# Altium PCB SCOPE.PcbDoc (part 4 of 4)
Units mil, origin at the board's own origin, x right, y up, seen from the top; angles counter-clockwise.
Board outline 7710 x 4000 mil, 2 copper layers (Top Layer, Bottom Layer); 219 components, 350 nets, 1637 pads, 359 vias.
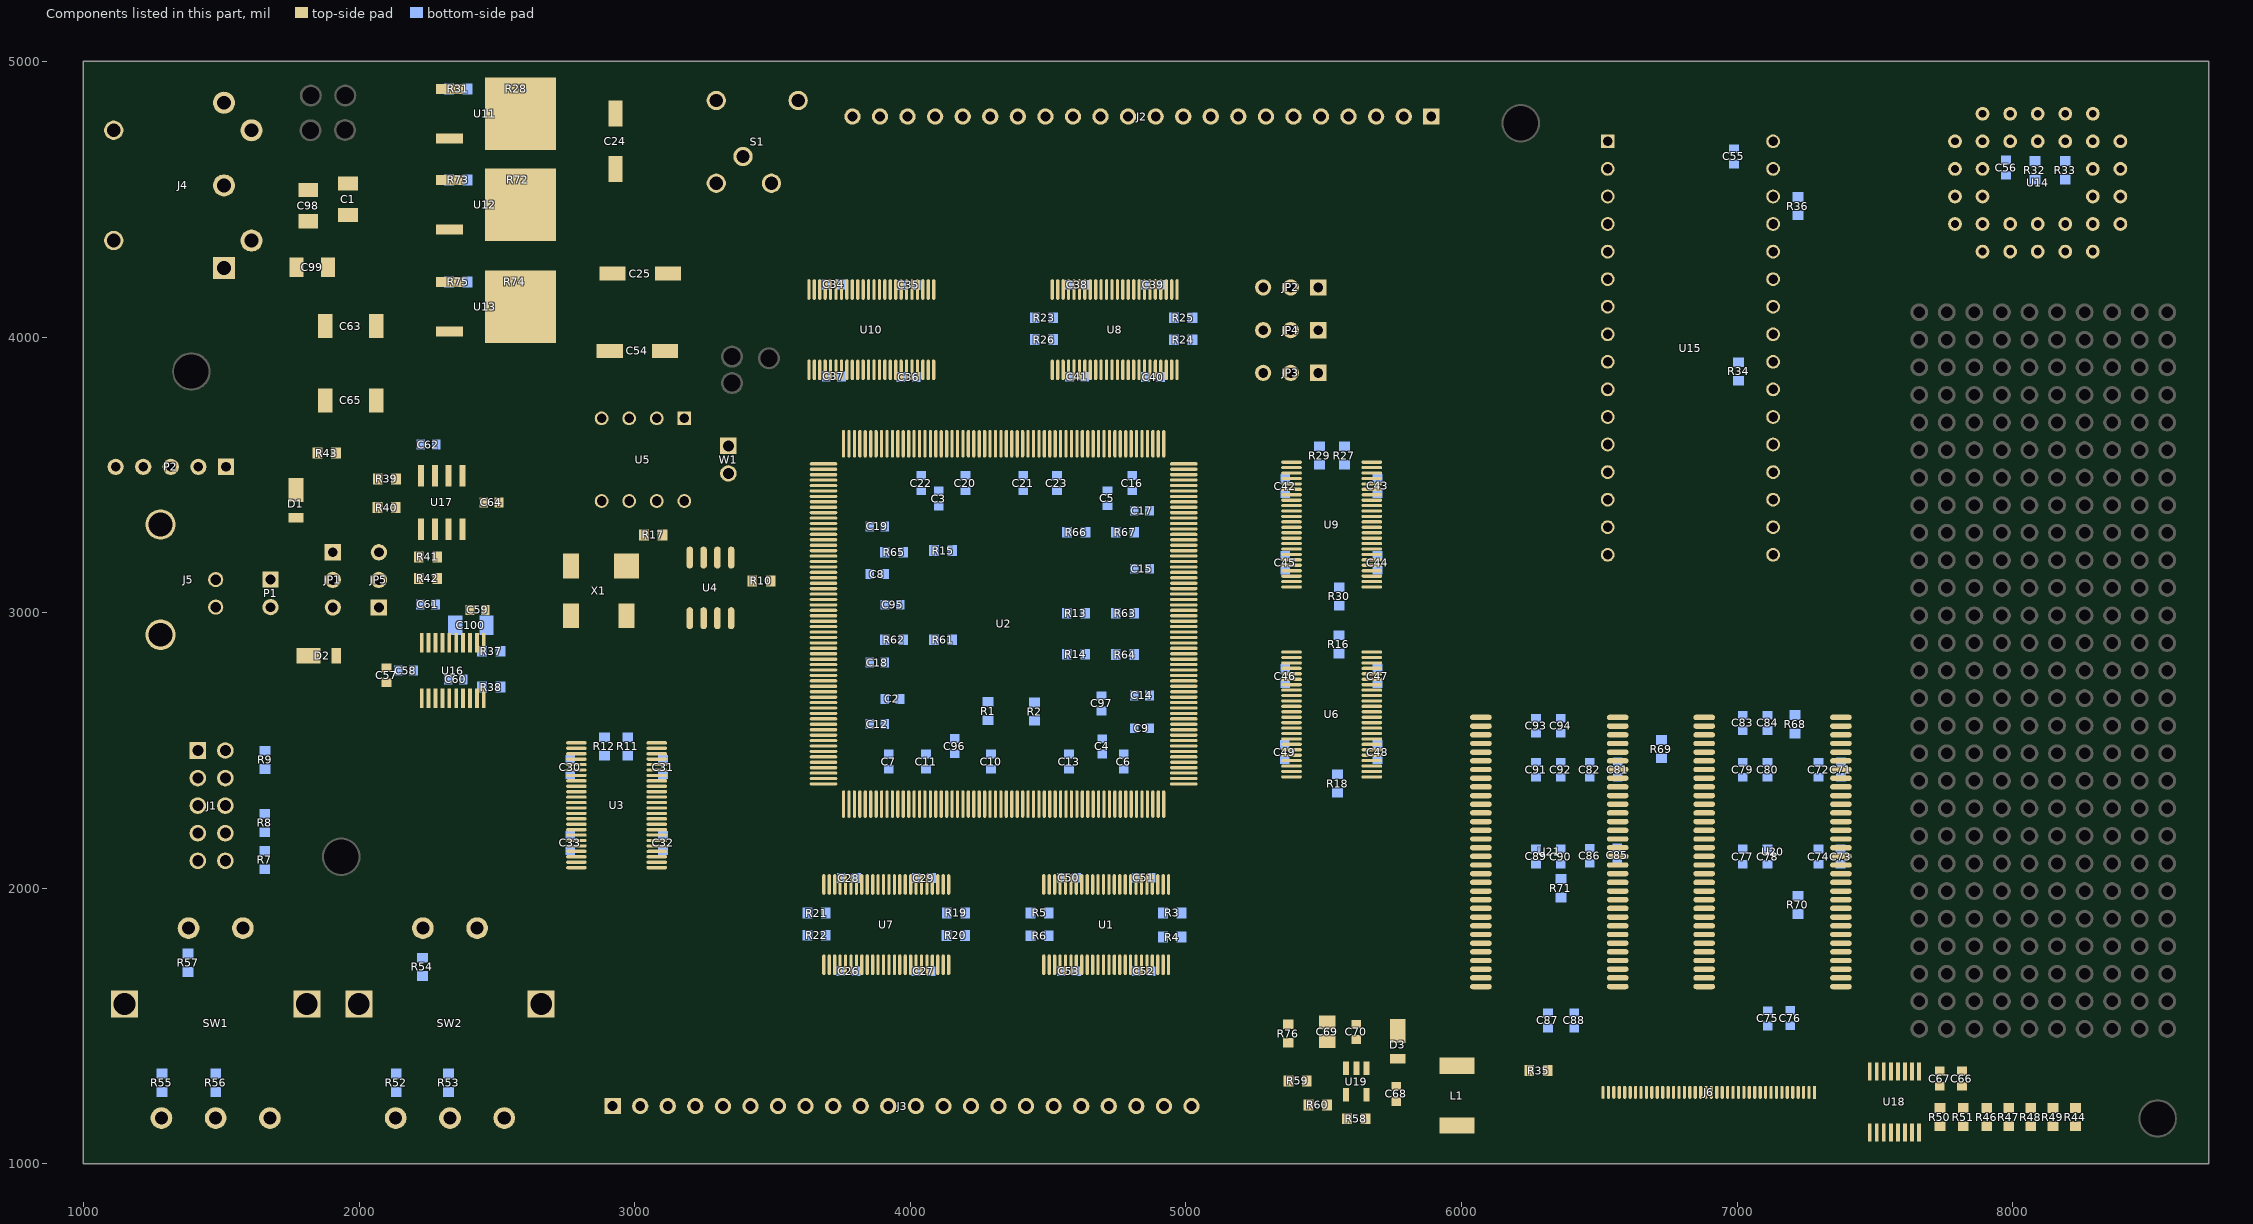
[diagram p4: the components of this part, seen from the top]

## Silkscreen, mask and mechanical layers (free items; w line width, h text height)
Top Overlay:
  lines w10: 8108,1447 7613,1447 7613,1535 8108,1535 ; 7612,4042 8613,4042 8613,4138 7612,4138 7612,4042 ; 8111,1447 8610,1447 8610,1535 8111,1535 8111,1447
  text "GND" at 1891,4935 h45
  text "+5V" at 1741,4934 h45
  text "-12V" at 1924,4646 h45
  text "+12V" at 1729,4644 h45
  text "NC" at 5014,4625 h45 r90
  text "IO4" at 3811,4587 h45 r90
  text "+5V" at 5815,4582 h45 r90
  text "GND" at 5916,4580 h45 r90
  text "IO240" at 3911,4499 h45 r90
  text "IO239" at 4016,4499 h45 r90
  text "IO238" at 4113,4499 h45 r90
  text "IO237" at 4215,4499 h45 r90
  text "IO236" at 4312,4499 h45 r90
  text "IO235" at 4412,4499 h45 r90
  text "IO234" at 4513,4499 h45 r90
  text "IO233" at 4611,4499 h45 r90
  text "IO230" at 4713,4499 h45 r90
  text "IO224" at 4810,4499 h45 r90
  text "IO223" at 4913,4499 h45 r90
  text "+3.3V" at 5715,4499 h45 r90
  text "DATA7" at 5115,4491 h45 r90
  text "DATA6" at 5212,4491 h45 r90
  text "DATA5" at 5313,4491 h45 r90
  text "DATA4" at 5411,4491 h45 r90
  text "DATA3" at 5514,4491 h45 r90
  text "DATA2" at 5615,4491 h45 r90
  text "EE52 SoPC" at 5819,4448 h60
  text "Oscilloscope" at 5747,4364 h60
  text "LO" at 5397,4254 h45
  text "HI" at 5292,4253 h45
  text "Santiago" at 5870,4158 h60
  text "Navonne" at 5892,4069 h60
  text "GND" at 7418,4064 h60
  text "3.3V" at 3276,3982 h45
  text "2.5V" at 3411,3820 h45
  text "1.25V" at 3267,3726 h45
  text "GND" at 1140,3609 h45 r90
  text "-12V" at 1240,3609 h45 r90
  text "+12V" at 1343,3609 h45 r90
  text "nIN" at 1441,3609 h45 r90
  text "IN" at 1539,3609 h45 r90
  text "FE" at 1955,3288 h45
  text "ADC" at 1930,2910 h45
  text "5V" at 7480,1463 h60
  text "3.3V" at 8279,1367 h60
  text "IO43" at 2943,1321 h45 r90
  text "IO44" at 3041,1321 h45 r90
  text "IO45" at 3143,1321 h45 r90
  text "IO46" at 3244,1321 h45 r90
  text "IO49" at 3345,1321 h45 r90
  text "IO50" at 3444,1321 h45 r90
  text "IO51" at 3542,1321 h45 r90
  text "IO52" at 3642,1321 h45 r90
  text "GND" at 3743,1321 h45 r90
  text "IO71" at 3842,1321 h45 r90
  text "IO73" at 3945,1321 h45 r90
  text "IO76" at 4041,1321 h45 r90
  text "IO78" at 4142,1321 h45 r90
  text "IO80" at 4242,1321 h45 r90
  text "IO81" at 4343,1321 h45 r90
  text "DEV_OE" at 4442,1321 h45 r90
  text "DEV_CLR" at 4543,1316 h45 r90
  text "nCEO" at 4643,1316 h45 r90
  text "GND" at 4743,1316 h45 r90
  text "GND" at 4845,1316 h45 r90
  text "+3.3V" at 4943,1316 h45 r90
  text "+5V" at 5043,1316 h45 r90
  text "v1.1 06/2014" at 1026,1030 h60
Mechanical 1:
  lines w10: 1785,1965 1785,2265 2085,2265 2085,1965 ; 8710,990 990,990 990,5000 8720,5000 8720,990 ; 8375,1015 8375,1315 8675,1315 8675,1015 8375,1015
Mechanical 4:
  lines w30: 975,1185 975,975 1185,975 ; 975,4805 975,5015 1185,5015 ; 8520,5020 8730,5020 8730,4810

## Text inside footprints (layer, text, board x,y; h text height)
Designator2: Top Overlay "T" at 6078.65,3963.09 h18 r8; Top Overlay "U" at 6096,3965 h18; Top Overlay "T" at 6113.44,3964.48 h18 r352; Top Overlay "E" at 6130.65,3961.54 h18 r344; Top Overlay "F" at 6177.52,3938.97 h18 r320; Top Overlay "T" at 6045.59,3952.16 h18 r24; Top Overlay "S" at 6030.52,3943.36 h18 r32; Top Overlay "O" at 6214.45,3783.88 h18 r244; Top Overlay "O" at 6226.54,3823.87 h18 r263; Top Overlay "G" at 6204,3766 h18 r234; Top Overlay "Y" at 6190,3750 h18 r225; Top Overlay "T" at 6197.7,3921.66 h18 r310; Top Overlay "E" at 6209.86,3904.58 h18 r301; Top Overlay "C" at 6219.02,3885.73 h18 r292; Top Overlay "H" at 6224.95,3865.62 h18 r282; Top Overlay "N" at 6227.48,3844.82 h18 r272; Top Overlay "L" at 6222.16,3803.37 h18 r254; Top Overlay "O" at 6159,3951 h18 r328; Top Overlay "I" at 6065,3960 h18 r16; Top Overlay "N" at 6015,3931 h18 r40; Top Overlay "I" at 6004,3920 h18 r48; Top Overlay "A" at 6016.32,3748.65 h18 r132; Top Overlay "N" at 5976.51,3855.23 h18 r78; Top Overlay "R" at 5975.82,3835.58 h18 r87; Top Overlay "O" at 5978.21,3816.06 h18 r96; Top Overlay "F" at 5983.62,3797.16 h18 r105; Top Overlay "L" at 6002.91,3763.03 h18 r123; Top Overlay "C" at 6031.81,3736.54 h18 r141; Top Overlay "I" at 5980,3876 h18 r69; Top Overlay "A" at 5985,3891 h18 r60; Top Overlay "I" at 5990,3782 h18 r118